# Altium PCB ECG_Board.PcbDoc (part 2 of 2)
Units mm, origin at the board's own origin, x right, y up, seen from the top; angles counter-clockwise.
Board outline 69.98 x 44.96 mm, 4 copper layers (Top Layer, Layer 1, Layer 2, Bottom Layer), stack 0.603 mm thick; 97 components, 77 nets, 390 pads, 9 vias.
Unrouted connection lines stored in the file: 228.
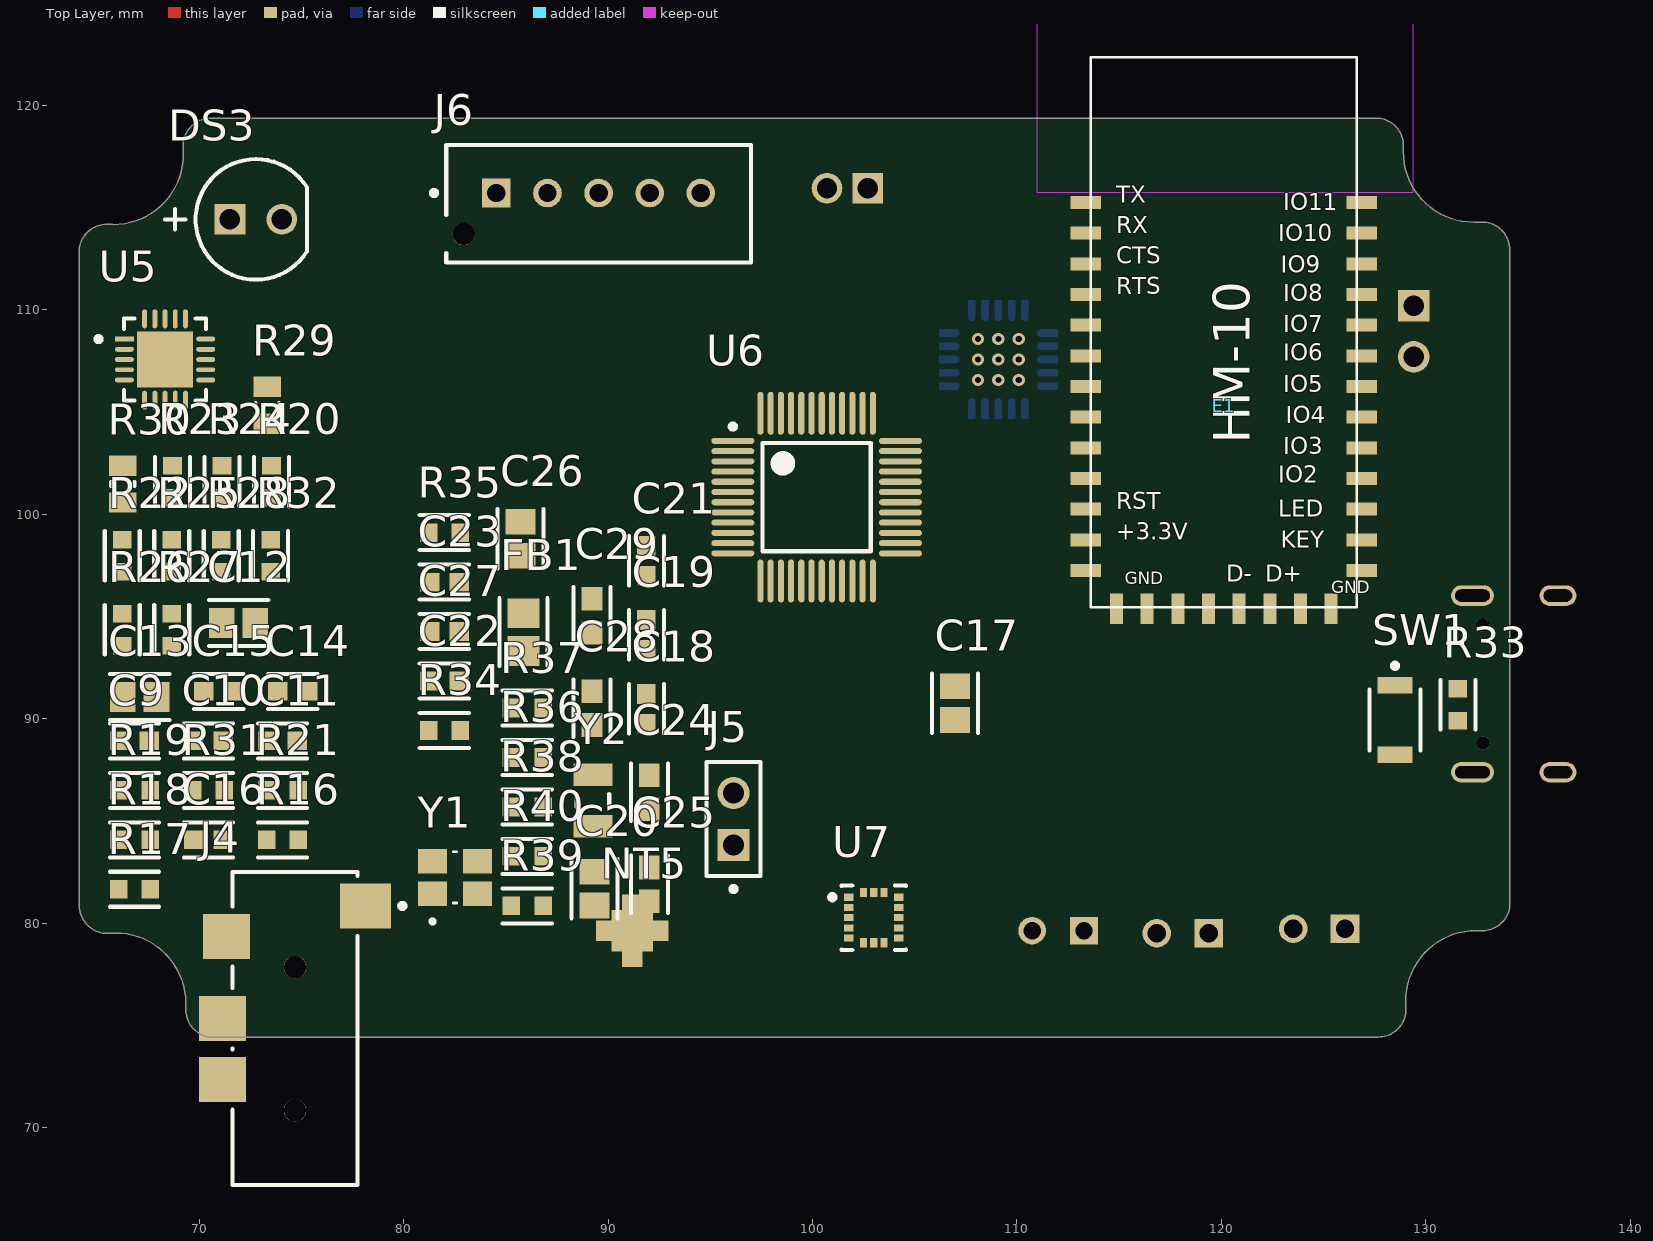
[diagram p0: Top Layer view]

## Part data (continued)
SW1: library part "Tactile Switch", "Tactile Switch, SPST-NO, 0.05 A, 12 V, -25 to 70 degC, 2-Pin SMD, RoHS, Tape and Reel", Case/Package=B3U-1000, Contact Current Rating=50mA, IP Rating=IP40, Manufacturer="Omron Electronic Components", Max Contact Resistance=100mohm, Max Operating Temperature=70°C, Max Voltage Rating (DC)=12V, Min Operating Temperature=-25°C, Operating Force=153gf, Package Description="2-Pin Surface Mount Device, Body 3 x 2.5 mm", Package Quantity=3500, Resistance=0.1Ohm, Contact Material=Silver, Current Rating=50mA, Datasheet URL=http://www.omron.com/ecb/products/pdf/en-b3u.pdf, Datasheet Version=Jan-15, Manufacturer URL=http://www.omron.com/, Max Current Rating=50mA, Mounting Technology=SM, Package Reference=B3U-1000, Packaging=TapeandReel, RoHS Compliant=True, Throw Configuration=SPST, Voltage Rating=12V, Voltage Rating (DC)=12V
U1: library part CMP-04918-000700-1, "1.8-V TO 5.5-V, 75-NA IQ BUCK-BO", RoHS Compliant=Yes
U2: library part CMP-04917-000027-1, "IC REG LINEAR POS ADJ 1A 20VQFN", Dropout Voltage=307mV, Manufacturer="Texas Instruments", Max Junction Temp=+125°C, Max Supply Voltage=35V, Min Supply Voltage=3V, Nominal Supply Current=0.58-6.1mA, Output Current=1A, Output Voltage=1.4-20.5V, Package=RGW0020A, Temperature="-40°C to +125°C", Temperature Range Low=-40°C, Accuracy Percentage=1%, Automotive=No, Category=IC, ComponentLink2Description=Datasheet, ComponentLink2URL=http://www.ti.com/lit/ds/symlink/tps7a47.pdf, Device Class L1="Integrated Circuits (ICs)", Device Class L2="Power Management ICs", Device Class L3="Voltage Regulators - Linear", Digikey Description="IC REG LINEAR POS ADJ 1A 20VQFN", Height=1mm, Lead Free=Yes, Manufacturer Part Number=TPS7A4700RGWR, Mouser Description="LDO Voltage Regulators Low Noise,1A,Hi Vltg LDO Reg", Number of Outputs=1, Octopart=https://octopart.com/tps7a4700rgwr-texas+instruments-21221956, Output Type=AdjustableProgrammable, RoHS=TRUE, Standoff Height=0mm, Temperature Range High=+125°C
U3: "3ÂµA 1-Cell/2-Cell Fuel Gauge with ModelGauge", Package="TDFN-8 Maxim", Availability="In Stock", Check_prices=https://www.snapeda.com/parts/MAX17048G+T10/Analog+Devices/view-part/?ref=eda, MF="Analog Devices", MP=MAX17048G+T10, Price=None, Purchase-URL=https://pricing.snapeda.com/search/part/MAX17048G+T10/?ref=eda, SnapEDA_Link=https://www.snapeda.com/parts/MAX17048G+T10/Analog+Devices/view-part/?ref=snap
U4: library part CMP-0321-00220-3, "IC LI-ION CHARGE MGMT 16-QFN", Battery Pack Voltage=4.2V, Case/Package=VQFN, Max Charge Current=1.5A, Max Operating Temperature=125°C, Max Supply Voltage=10.2V, Min Input Voltage=4.3V, Min Operating Temperature=-40°C, Min Supply Voltage=4.35V, Package Quantity=3000, Battery Chemistry=LITHIUM-ION, Contact Plating=Gold, Fault Protection="Over Voltage", Interface=USB, Lead Free="Lead Free", Number of Cells=1, Number of Pins=16, Output Current=1.5A, Output Voltage=4.2V, Packaging="Tape and Reel", Radiation Hardening=No, RoHS Compliant=Yes, Series=-, Weight=0.000808oz
U5: library part CMP-09085-000022-1, "IC ECG FRONT END 20LFCSP", Case/Package="LFCSP EP", Input Bias Current=200pA, Input Offset Voltage (Vos)=3mV, Max Operating Temperature=85°C, Max Supply Voltage=3.5V, Min Operating Temperature=-40°C, Min Supply Voltage=2V, Operating Supply Current=170uA, Power Supply Rejection Ratio (PSRR)=90dB, Common Mode Rejection Ratio=80dB, Contact Plating=Tin, Gain Bandwidth Product=100kHz, Height=0.75mm, Lead Free="Contains Lead", Length=4.1mm, Mount="Surface Mount", Number of Channels=1, Number of Pins=20, Packaging=Tray, Radiation Hardening=No, REACH SVHC="No SVHC", RoHS Compliant=Yes, Series=-, Slew Rate=0.2V/µs, Width=4.1mm
U6: "MCU 32-bit STM32F1 ARM Cortex M3 RISC 64KB Flash 2.5V/3.3V 48-Pin LQFP Tray", Case/Package=LFQFP, Clock Frequency=16MHz, Frequency=72MHz, I/Os (High Current)=37, Manufacturer=STMicroelectronics, Manufacturer Package Identifier=ai14911d, Max Operating Temperature=85°C, Max Power Dissipation=363mW, Max Supply Current=50mA, Max Supply Voltage=3.6V, Min Operating Temperature=-40°C, Min Supply Voltage=2V, Nominal Supply Current=1.7µA, Operating Frequency(F) (Processor speed) (MHz)=72, Operating Supply Voltage=3.3V, Supplier Part Number=497-6063-ND, Supply Voltage(Vcc) min (V)=2, Temperature Grade=Industrial, A/D Converter="2x12-bit (10 Channel)", ADC Channels (Resolution)="10-Ch 12-Bit", Address Bus Width=32b, Category=Microcontrollers, China RoHS=Compliant, ComponentLink1Description="Manufacturer URL", ComponentLink1URL=http://www.st.com/web/en/home.html, ComponentLink2Description=Datasheet, ComponentLink2URL=http://www.st.com/st-web-ui/static/active/en/resource/technical/document/datasheet/CD00161566.pdf, ComponentLink3Description="Package Specification", ComponentLink3URL=http://www.st.com/st-web-ui/static/active/en/resource/technical/document/datasheet/DM00058181.pdf, ComponentLink4Description=https://datasheet.octopart.com:443/STM32F103C8T6-STMicroelectronics-datasheet-177520228.pdf?src-supplier=IHS, ComponentLink4URL=https://datasheet.octopart.com:443/STM32F103C8T6-STMicroelectronics-datasheet-177520228.pdf?src-supplier=IHS, ComponentLink5Description=https://datasheet.octopart.com:443/STM32F103C8T6-STMicroelectronics-datasheet-10330614.pdf?src-supplier=Newark, ComponentLink5URL=https://datasheet.octopart.com:443/STM32F103C8T6-STMicroelectronics-datasheet-10330614.pdf?src-supplier=Newark, ComponentLink6Description=https://datasheet.octopart.com:443/STM32F103C8T6-STMicroelectronics-datasheet-16839800.pdf?src-supplier=Newark, ComponentLink6URL=https://datasheet.octopart.com:443/STM32F103C8T6-STMicroelectronics-datasheet-16839800.pdf?src-supplier=Newark, ComponentLink7Description=https://datasheet.octopart.com:443/STM32F103C8T6-STMicroelectronics-datasheet-48026265.pdf?src-supplier=ICpick, ComponentLink7URL=https://datasheet.octopart.com:443/STM32F103C8T6-STMicroelectronics-datasheet-48026265.pdf?src-supplier=ICpick, ComponentLink8Description=https://datasheet.octopart.com:443/STM32F103C8T6-STMicroelectronics-datasheet-14363502.pdf?src-supplier=Farnell, ComponentLink8URL=https://datasheet.octopart.com:443/STM32F103C8T6-STMicroelectronics-datasheet-14363502.pdf?src-supplier=Farnell, ComponentLink9Description=https://datasheet.octopart.com:443/STM32F103C8T6-STMicroelectronics-datasheet-500013.pdf?src-supplier=Farnell, ComponentLink9URL=https://datasheet.octopart.com:443/STM32F103C8T6-STMicroelectronics-datasheet-500013.pdf?src-supplier=Farnell, ComponentLink10Description=https://datasheet.octopart.com:443/STM32F103C8T6-STMicroelectronics-datasheet-8365036.pdf?src-supplier=Farnell, ComponentLink10URL=https://datasheet.octopart.com:443/STM32F103C8T6-STMicroelectronics-datasheet-8365036.pdf?src-supplier=Farnell, ComponentLink11Description=https://datasheet.octopart.com:443/STM32F103C8T6-STMicroelectronics-datasheet-6396519.pdf?src-supplier=Verical, ComponentLink11URL=https://datasheet.octopart.com:443/STM32F103C8T6-STMicroelectronics-datasheet-6396519.pdf?src-supplier=Verical, ComponentLink12Description=https://datasheet.octopart.com:443/STM32F103C8T6-STMicroelectronics-datasheet-21407612.pdf?src-supplier=element14+APAC, ComponentLink12URL=https://datasheet.octopart.com:443/STM32F103C8T6-STMicroelectronics-datasheet-21407612.pdf?src-supplier=element14+APAC, ComponentLink13Description=https://datasheet.octopart.com:443/STM32F103C8T6-STMicroelectronics-datasheet-8700640.pdf?src-supplier=element14, ComponentLink13URL=https://datasheet.octopart.com:443/STM32F103C8T6-STMicroelectronics-datasheet-8700640.pdf?src-supplier=element14, ComponentLink14Description=https://datasheet.octopart.com:443/STM32F103C8T6-STMicroelectronics-datasheet-165583531.pdf?src-supplier=SOS+electronic, ComponentLink14URL=https://datasheet.octopart.com:443/STM32F103C8T6-STMicroelectronics-datasheet-165583531.pdf?src-supplier=SOS+electronic, ComponentLink15Description=https://datasheet.octopart.com:443/STM32F103C8T6-STMicroelectronics-datasheet-14106722.pdf?src-supplier=iiiC, ComponentLink15URL=https://datasheet.octopart.com:443/STM32F103C8T6-STMicroelectronics-datasheet-14106722.pdf?src-supplier=iiiC, ComponentLink16Description=https://datasheet.octopart.com:443/STM32F103C8T6-STMicroelectronics-datasheet-17594274.pdf?src-supplier=TME, ComponentLink16URL=https://datasheet.octopart.com:443/STM32F103C8T6-STMicroelectronics-datasheet-17594274.pdf?src-supplier=TME, ComponentLink17Description=https://datasheet.octopart.com:443/STM32F103C8T6-STMicroelectronics-datasheet-148251.pdf?src-supplier=Nu+Horizons, ComponentLink17URL=https://datasheet.octopart.com:443/STM32F103C8T6-STMicroelectronics-datasheet-148251.pdf?src-supplier=Nu+Horizons, Core="ARM Cortex-M3", Core Architecture=ARM, Country of Origin=Malaysia, Data Bus Width=32b, DatasheetVersion="Rev. 16", Density=512kb, EEPROM Memory Size=0B, Export Control Classification Number (ECCN) Code=3A991.A.2, Flash Memory Size=64kB, FLASH Size (Prog) (kB)=64, Harmonized Tariff Schedule (HTS) Code=8542.31.00.25, Height=1.45mm, Height - Seated (Max)=1.6mm, Interface="CAN, USB", Internal RAM Size (kB)=20, Introduction Date=2007-06-07, Lead Free="Lead Free", Length=7mm, Lifecycle Status=Production, Manufacturer Part Number=STM32F103C8T6, Memory Format=FLASH, Memory Size=64kB, Mounting Technology="Surface Mount", Number of A/D Converters=2, Number of ADC Channels=10, Number of Bits=32, Number of Channels=10, Number of I2C Channels=2, Number of I/Os=37, Number of Interrupts=16, Number of Programmable I/O=48, Number of PWM Channels=1, Number of SPI Channels=2, Number of Terminals=48, Number of Timers/Counters=4, Number of USART Channels=3, Oscillator Type=Internal, PackageDescription="48-Pin Low Profile Quad Flat Package, 7 x 7 mm Body, 0.5 mm Pitch", PackageReference=LQFP48, PackageVersion="Rev. 6, 06/2013", Packing=Tray, PartNumber=STM32F103C8T6, Peripherals=POR, Pins=48, Pricing="1=6.15, 10=4.713, 25=4.3536, 100=3.9587, 250=3.77048, 500=3.657, 1000=3.5636, 2500=3.46503 (USD)", Radiation Hardening=No, RAM Size=20kB, REACH SVHC=Yes, RoHS=Compliant, Schedule B=8542310000, Stock=1445, Supplier=DigiKey, Terminal Pitch=500µm, Termination=SMD/SMT, Watchdog Timer=Yes, Width=7mm
U7: library part CMP-0234-00055-6, "ACCEL 2-16G I2C/SPI 16LGA", Case/Package=LGA, Max Operating Temperature=85°C, Max Supply Voltage=3.6V, Min Operating Temperature=-40°C, Min Supply Voltage=1.71V, Operating Supply Current=11uA, Operating Supply Voltage=2.5V, Package Quantity=1, Axis="X, Y, Z", Bandwidth=5kHz, Contact Plating=Gold, Depth=3mm, Height=1mm, Interface=I2C, Lead Free="Lead Free", Length=3mm, Max Supply Voltage (DC)=3.6V, Min Supply Voltage (DC)=1.71V, Number of Pins=16, Output Type=Digital, Packaging="Tape and Reel", Radiation Hardening=No, REACH SVHC="No SVHC", Resolution=16b, RoHS Compliant=Yes, Sensor Type="3 Axis", Series=-, Width=3mm
Y1: "Crystal, Aec-Q200, 8Mhz, 3.2Mm X 2.5Mm Rohs Compliant: Yes", Frequency=8MHz, Frequency Stability=50ppm, Frequency Tolerance=0.001%, Load Capacitance=18pF, Manufacturer=Abracon, Manufacturer Part Number=ABM8AIG-8.000MHZ-1Z-T, Max Operating Temperature=125°C, Min Operating Temperature=-40°C, Package="NON STANDARD Abracon", Supplier Part Number=535-15256-6-ND, Category=Crystals, Check_prices=https://www.snapeda.com/parts/ABM8AIG-8.000MHZ-1Z-T/Abracon/view-part/?ref=eda, China RoHS=Compliant, ComponentLink1Description=https://datasheet.octopart.com:443/ABM8AIG-8.000MHZ-1Z-T-Abracon-datasheet-154833173.pdf?src-supplier=Master+Electronics, ComponentLink1URL=https://datasheet.octopart.com:443/ABM8AIG-8.000MHZ-1Z-T-Abracon-datasheet-154833173.pdf?src-supplier=Master+Electronics, ComponentLink2Description=https://datasheet.octopart.com:443/ABM8AIG-8.000MHZ-1Z-T-Abracon-datasheet-78375026.pdf?src-supplier=JRH+Electronics, ComponentLink2URL=https://datasheet.octopart.com:443/ABM8AIG-8.000MHZ-1Z-T-Abracon-datasheet-78375026.pdf?src-supplier=JRH+Electronics, ComponentLink3Description=http://sigma.octopart.com:80/conflict_mineral_statement/Abracon-company-27.pdf?src-supplier=Compliance+Statements, ComponentLink3URL=http://sigma.octopart.com:80/conflict_mineral_statement/Abracon-company-27.pdf?src-supplier=Compliance+Statements, Country of Origin=Taiwan, ESR=500Ω, Introduction Date=2019-06-13, Lifecycle Status=Production, MF="Abracon LLC", Mounting Technology="Surface Mount", MP=ABM8AIG-8.000MHZ-1Z-T, Pricing="1=1.1, 10=0.959, 25=0.9064, 50=0.869, 100=0.833, 250=0.78776, 500=0.75518 (USD)", REACH SVHC=Yes, RoHS=Compliant, SnapEDA_Link=https://www.snapeda.com/parts/ABM8AIG-8.000MHZ-1Z-T/Abracon/view-part/?ref=snap, Supplier=DigiKey
Y2: library part CMP-2000-05735-3, "Crystal 32.768kHz ±20ppm (Tol) 6pF FUND 70kΩ 2-Pin CSMD T/R", Case/Package=CSMD, ESR (Equivalent Series Resistance)=70kR, Frequency=32.768kHz, Frequency Tolerance=20ppm, Load Capacitance=6pF, Max Operating Temperature=85°C, Min Operating Temperature=-40°C, Operating Frequency="32.768 kHz", Package Quantity=3000, Depth=1.5mm, Height=0.9mm, Lead Free="Lead Free", Length=3.2mm, Mount="Surface Mount", Number of Pins=2, Packaging="Tape and Reel", Radiation Hardening=No, REACH SVHC="No SVHC", RoHS Compliant=Yes, Series=ABS07, Series Resistance=70kR, Termination=SMD/SMT, Tolerance=20ppm, Width=1.5mm

## Via types
v1: diameter 0.6, hole 0.3, Top Layer to Bottom Layer, 9 vias

## Nets (pads, with @x,y where several pads share a name; then routed paths per layer and width w, separated by ;. In a path a pad name is that pad's centre, name@x,y a point inside that pad or via, vN(x,y) a via of type N, cw(c..) or ccw(c..) an arc to the next point about the centre after c; other vN are vias at no path point)
3V3: C17.2 E1.12 R7.2 R33.2
5V: C6.2 NT1.2 U4.13
AGND: C9.1 C10.1 C26.1 C27.1 NT5.3 R17.1 R32.1 U5.14 U5.16 U5.21 U6.8
AVDD: C9.2 R16.2 R21.2 R22.2 U5.15 U5.17
BGND: C6.1 C8.1 J2.2 J3.2 NT3.1 R10.1 R12.1 R13.1 R14.1 U4.4 U4.6 U4.8 U4.14 U4.17
BOOT0: J5.2 R34.1 R35.2 U6.44
BOOT1: R36.1 U6.20
DGND: C18.1 C19.1 C20.2 C21.1 C22.1 C23.1 C24.1 C25.1 J6.2 NT5.1 R34.2 R36.2 U6.23 U6.35 U6.47 U7.5 U7.12 Y1.2 Y1.4
DVDD: C19.2 C20.1 C21.2 C22.2 C23.2 FB1.1 J5.1 J6.1 R35.1 R37.2 R38.1 R39.1 U6.1 U6.24 U6.36 U6.48 U7.1 U7.7 U7.8 U7.14
GBUCK: C1.1 C2.1 R4.1 R5.1 U1.5 U1.8 U1.11
GND: C17.1 E1.13 E1.14 E1.21 E1.22 J1.A1-B12 J1.B1-A12 NT4.1 NT5.2 R2.1 R6.1 SW1.2
IAOUT: C13.2 R20.2 R27.2 U5.19
LA: J4.4 R21.1 R24.1
LOD+: U5.12 U6.19
LOD-: U5.11 U6.18
NetC2_2: C2.2 R1.1 U1.6
NetC4_2: C4.2 R7.1 U2.1 U2.3 U2.20
NetC5_2: C5.2 U2.14
NetC7_1: C7.1 NT3.4 R100.2 U3.1 U3.4 U3.6 U3.9
NetC11_2: C11.2 R18.2
NetC12_1: C12.1 U5.1
NetC12_2: C12.2 R19.1 U5.20
NetC14_1: C14.1 R29.2 U5.5
NetC14_2: C14.2 U5.4
NetC15_2: C15.2 R23.1 R27.1 R28.1
NetC24_2: C24.2 R40.1 Y1.3
NetC26_2: C26.2 C27.2 FB1.2 U6.9
NetC28_2: C28.2 C29.1
NetDS1_1: DS1.1 R9.1
NetDS1_2: DS1.2 U4.9
NetDS2_1: DS2.1 R11.1
NetDS2_2: DS2.2 U4.7
NetDS3_2: DS3.2 R32.2
NetE1_23: E1.23 R33.1 SW1.1
NetJ1_A5: J1.A5 R2.2
NetJ1_B5: J1.B5 R6.2
NetL1_1: L1.1 U1.7
NetL1_2: L1.2 U1.9
NetR4_2: R4.2 U1.3
NetR5_2: R5.2 U1.4
NetR8_1: R8.1 R9.2 R11.2 U4.5 U4.10 U4.11
NetR10_2: R10.2 U4.12
NetR12_2: R12.2 U4.15
NetR13_2: R13.2 U4.16
NetR14_2: R14.2 U4.1
NetR18_1: R18.1 R19.2 R20.1
NetR24_2: R24.2 U5.2
NetR26_2: R26.2 U5.3
NetR39_2: R39.2 U7.6
NetR100_1: R100.1 U3.5
NetU2_8: U2.8 U2.11 U2.12
NRST: C18.2 J6.5 R37.1 U6.7
OPAMP+: C16.1 R28.2 U5.7
OPAMP-: R30.1 R31.2 U5.9
OSC_IN_8M: C25.2 U6.5 Y1.1
OSC_IN_32: C28.1 U6.3 Y2.2
OSC_OUT_8M: R40.2 U6.6
OSC_OUT_32: C29.2 U6.4 Y2.1
OUT: C15.1 DS3.1 R31.1 U5.10 U6.11
"Power Ground": C3.1 C4.1 NT2.2 NT3.2 NT4.2 U2.2 U2.17 U2.18 U2.19 U2.21
  other v1: 108.093,106.569 109.093,106.569 110.093,106.569 108.093,107.569 109.093,107.569 110.093,107.569 108.093,108.569 109.093,108.569 110.093,108.569
RA: J4.3 R22.1 R26.1
REFOUT: C11.1 C16.2 R25.1 R30.2 U5.8
RL: J4.2 R29.1
SCL1: R38.2 U3.7 U6.42 U7.4
SDA1: U3.8 U6.43
SGNG: C5.1 NT2.1 U2.7
"Shutdown control": U5.13 U6.40
SW: C13.1 R23.2 R25.2 U5.6
SWDCLK: J6.4 U6.37
SWDIO: J6.3 U6.34
UART1_RX: E1.1 U6.31
UART1_TX: E1.2 U6.30
V_in_from_LiPo: C1.2 R8.2 R15.1 U1.1 U1.2 U1.10
VBAT: C7.2 C8.2 J2.1 J3.1 R15.2 U3.2 U3.3 U4.2 U4.3
Vin: J1.A4-B9 J1.B4-A9 NT1.1
Vout_to_LDO: C3.2 R1.2 R3.1 U2.13 U2.15 U2.16
Vref: C10.2 R16.1 R17.2 U5.18
pads on no net: E1.3 E1.4 E1.5 E1.6 E1.8 E1.9 E1.10 E1.11 E1.15 E1.16 E1.17 E1.18 E1.19 E1.20 E1.24 E1.25 E1.26 E1.27 E1.28 E1.29 E1.30 E1.31 E1.32 E1.33 E1.34 E1.$7 J1. J1.1 J1.2 J1.3 J1.4 J1.A6 J1.A7 J1.A8 J1.B6 J1.B7 J1.B8 J4. J4.1 J6. NT1.14 NT2.14 NT3.3 NT3.14 NT4.14 NT5.4 NT5.14 R3.2 U2.4 U2.5 U2.6 U2.9 U2.10 U6.2 U6.10 U6.12 U6.13 U6.14 U6.15 U6.16 U6.17 U6.21 U6.22 U6.25 U6.26 U6.27 U6.28 U6.29 U6.32 U6.33 U6.38 U6.39 U6.41 U6.45 U6.46 U7.2 U7.3 U7.9 U7.10 U7.11 U7.13 U7.15 U7.16

## Polygon pours and split planes (outlines as drawn)
no net on Layer 1 (split plane): 219 vertices, not listed, extent 64.644,74.931 133.602,118.871
no net on Layer 2 (split plane): 219 vertices, not listed, extent 64.644,74.931 133.602,118.871

## Text inside footprints (layer, text, board x,y; h text height)
E1: Top Overlay "IO11" at 123.032,114.87 h0.81; Top Overlay "IO10" at 122.778,113.346 h0.81; Top Overlay "IO9" at 122.905,111.822 h0.81; Top Overlay "IO8" at 123.032,110.425 h0.81; Top Overlay "IO7" at 123.032,108.901 h0.81; Top Overlay "IO6" at 123.032,107.504 h0.81; Top Overlay "IO5" at 123.032,105.98 h0.81; Top Overlay "IO4" at 123.159,104.456 h0.81; Top Overlay "IO3" at 123.032,102.932 h0.81; Top Overlay "IO2" at 122.778,101.535 h0.81; Top Overlay "LED" at 122.778,99.884 h0.81; Top Overlay "KEY" at 122.905,98.36 h0.81; Top Overlay "GND" at 125.373,96.126 h0.61; Top Overlay "D+" at 122.143,96.709 h0.81; Top Overlay "D-" at 120.238,96.709 h0.81; Top Overlay "GND" at 115.285,96.582 h0.61; Top Overlay "+3.3V" at 114.873,98.751 h0.81; Top Overlay "RST" at 114.873,100.251 h0.81; Top Overlay "RTS" at 114.873,110.751 h0.81; Top Overlay "CTS" at 114.873,112.251 h0.81; Top Overlay "RX" at 114.873,113.751 h0.81; Top Overlay "TX" at 114.873,115.251 h0.81